# EAGLE board AALeC (EAGLE 8.4.1)
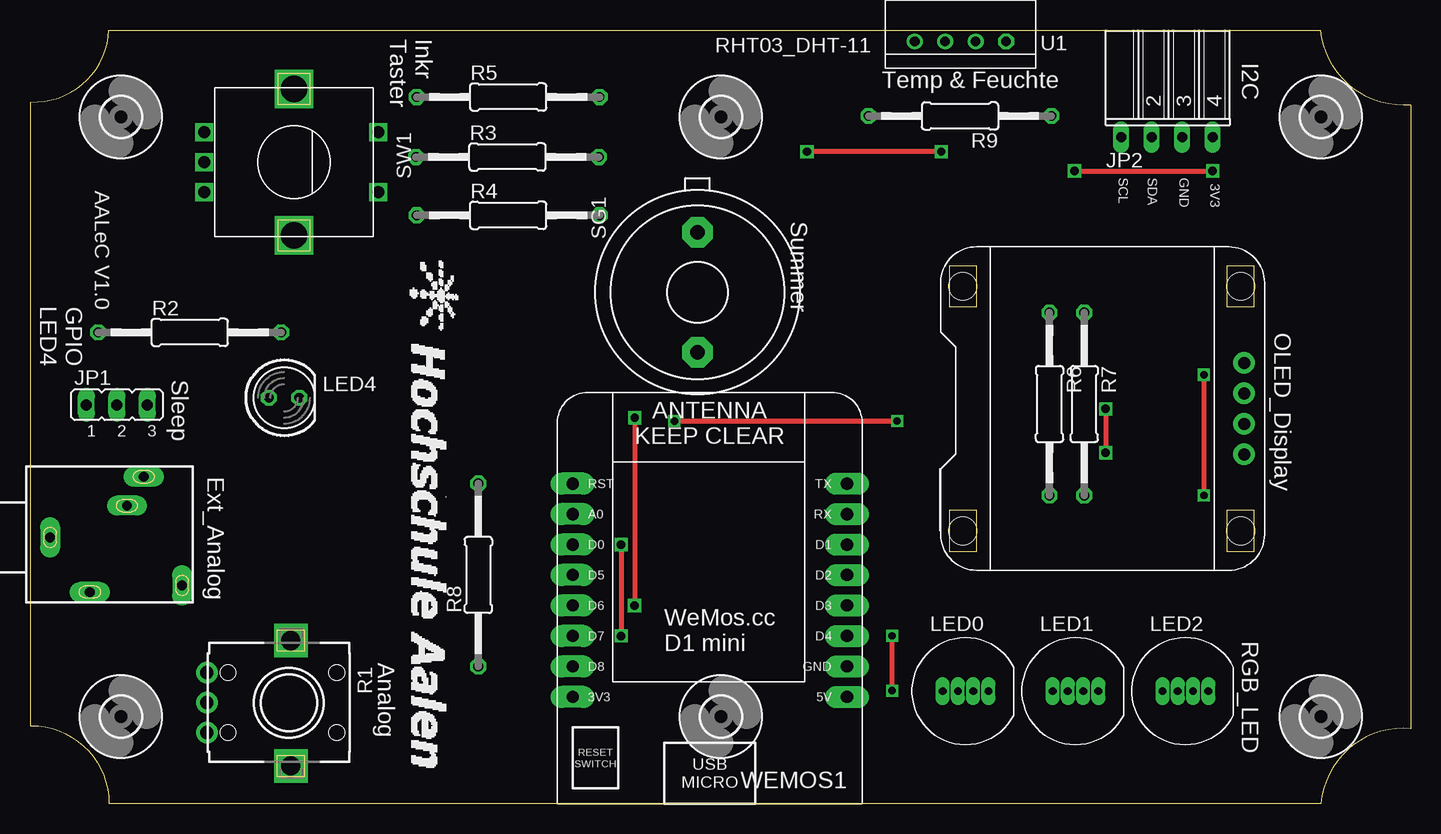
[diagram p0: board, top side]
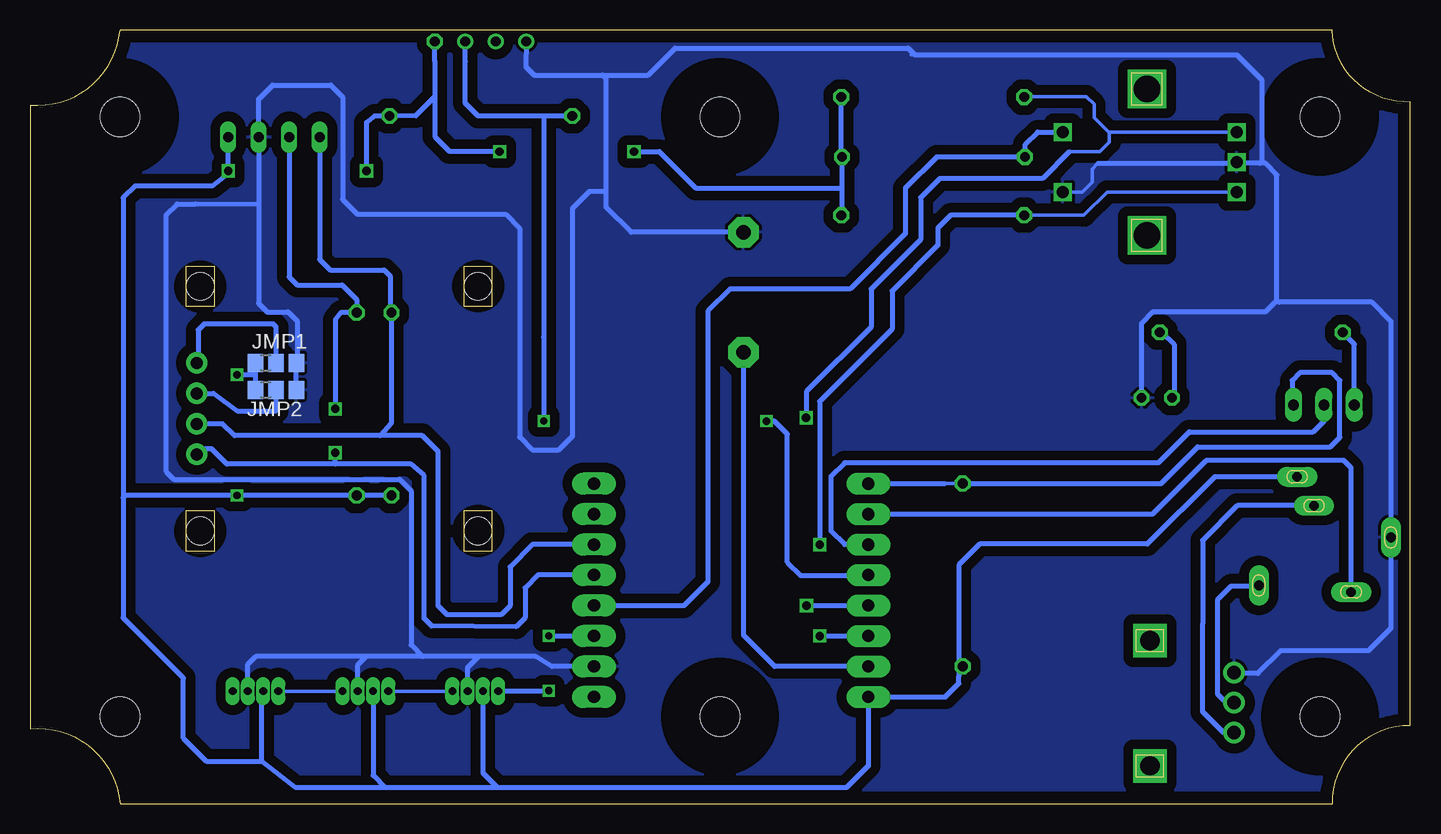
[diagram p1: board, bottom side, seen from below]

Size 115 x 64.5 mm. Coordinates in mm from the lower left corner, seen from the top.
Outline: 0,6.5 0,58.5 arc90 6.5,64.5 107.5,64.5 arc90 115,58.25 115,6.25 arc90 107.5,0 6.5,0 arc90 0,6.5
Copper layers (1*16): Top 0.035mm / dielectric 1.5mm / Bottom 0.035mm
Design rules "default *": minimum track width 10mil, minimum drill 19mil, track to track 8mil, track to pad 8mil, pad to pad 8mil, via to via 8mil, smd to smd 8mil, copper to edge 40mil, drill to drill 8mil, minimum pad ring 10mil, minimum via ring 8mil, stop-mask expansion 4mil, vias tented up to drill 0mil, thermal gap 10mil

## Footprints (pad centres in the part's own frame; a part is rotated, then mirrored left to right if it is on the bottom)
3,3 = hole 3.3: 0,0
A0R-JMP = smd 1.5 x 1.3: 1 0,1.7; 2 0,0; 3 0,-1.7
JP2 = drill 0.914 long: 1 -2.54,0; 2 0,0; 3 2.54,0
FE04W = drill 0.813 long: 1 -3.81,-6.35; 2 -1.27,-6.35; 3 1.27,-6.35; 4 3.81,-6.35
LED-PL9823-F8 = drill 0.65 long: 1 -1.905,0; 2 -0.635,0; 3 0.635,0; 4 1.905,0
LED5MM = drill 0.813 octagon: A -1.27,0; K 1.27,0
ALPS_1 = drill 1.1 pad 1.778: 1 -2.5,-7; 2 0,-7; 3 2.5,-7 | drill 1.6 pad 2.8 square: M1 5.27,0; M2 -5.17,0
0207/15 = drill 0.813 octagon: 1 -7.62,0; 2 7.62,0
F/EE17P = drill 1.194 pad 2.54 octagon: 1 -5.004,0; 2 5.004,0
ALPS_EC12E_SW = drill 1 square: A -2.5,-7.5; B 2.5,-7.5; C 0,-7.5; D -2.5,7; E 2.5,7 | drill 2.2 square: GND1 -6.1,0; GND2 6.1,0
DHT11 = drill 0.8: DATA -1.27,0; GND 3.81,0; NULL 1.27,0 | drill 0.8 octagon: VDD -3.81,0
OLED_0.96_I2C = drill 1 pad 1.778: GND -1.27,11.79; SCL 1.27,11.79; SDA 3.81,11.79; VCC -3.81,11.79 | hole 2.3: 10.19,-11.65; -10.19,11.5; 10.19,11.5; 10.19,-11.65; -10.2,-11.65
WEMOS-D1-MINI = drill 1.016 pad 1.829 long: 3V3 -10.16,-10.16; 5V 12.7,-10.16; A0 -10.16,5.08; D0 -10.16,2.54; D1 12.7,2.54; D2 12.7,0; D3 12.7,-2.54; D4 12.7,-5.08; D5 -10.16,0; D6 -10.16,-2.54; D7 -10.16,-5.08; D8 -10.16,-7.62; GND 12.7,-7.62; RESET -10.16,7.62; RX 12.7,5.08; TX 12.7,7.62
1503_09 = drill 0.8 pad 1.676 long: 1 0,-2.1; 2 -4.55,-5.4; 3 5.05,-9.9; 4 -4,-13.1; 5 2.65,-8.5

## Placement (x,y rotation side)
H1  MOUNT-HOLE3.3  [3,3]  57.5,7.25 0 top
H2  MOUNT-HOLE3.3  [3,3]  7.5,7.25 0 top
H3  MOUNT-HOLE3.3  [3,3]  7.5,57.25 0 top
H4  MOUNT-HOLE3.3  [3,3]  57.5,57.25 0 top
H5  MOUNT-HOLE3.3  [3,3]  107.5,7.25 0 top
H6  MOUNT-HOLE3.3  [3,3]  107.5,57.25 0 top
JMP1  0R-JUMPA  [A0R-JMP]  94.5,36.75 90 bottom
JMP2  0R-JUMPA  [A0R-JMP]  94.5,34.5 90 bottom
JP1  [JP2]  7.17,33.24 0 top
JP2  FE04-W  [FE04W]  94.67,61.91 0 top
LED0  LED-PL9823-F8  [LED-PL9823-F8]  77.89,9.37 0 top
LED1  LED-PL9823-F8  [LED-PL9823-F8]  87.05,9.37 0 top
LED2  LED-PL9823-F8  [LED-PL9823-F8]  96.21,9.37 0 top
LED4  grn  [LED5MM]  21.1,33.83 0 top
R1  ALPS_1  [ALPS_1]  21.66,8.41 270 top
R2  700R  [0207/15]  13.23,39.29 0 top
R3  10k  [0207/15]  39.71,53.91 0 top
R4  10k  [0207/15]  39.77,49.05 0 top
R5  10k  [0207/15]  39.77,58.91 0 top
R6  10k  [0207/15]  84.88,33.31 270 top
R7  10k  [0207/15]  87.78,33.31 270 top
R8  10k  [0207/15]  37.28,19.06 90 top
R9  4k7  [0207/15]  77.43,57.33 180 top
SG1  F/EE17P  [F/EE17P]  55.55,42.63 90 top
SW1  EC12E_SW  [ALPS_EC12E_SW]  21.93,53.48 270 top
U1  RHT03_DHT-11  [DHT11]  77.46,63.55 180 top
U$1  OLED_0.96_I2C  [OLED_0.96_I2C]  89.31,32.93 270 top
WEMOS1  Mini  [WEMOS-D1-MINI]  55.3,19.05 0 top
X1  1503_09  [1503_09]  -0.5,22.19 90 top

## Library data of the parts
H1-H6 = holes
JMP1 JMP2 = jump-0r-smd
JP1 = jumper
JP2 = con-lsta; OC_FARNELL: unknown; OC_NEWARK: unknown
LED0 LED1 LED2 = Ai_LED
LED4 = led
R1 = pot
R2-R9 = rcl
SG1 = buzzer; OC_FARNELL: unknown; OC_NEWARK: unknown
SW1 = switch-alps; MPN: EC12E2424407; OC_FARNELL: 1520813; OC_NEWARK: 74M1068
U1 = RHT03_DHT-22_AM2302
U$1 = tft_1.8_1.44_oled_0.96
WEMOS1 = esp8266modules
X1 = con-lumberg; OC_FARNELL: 1243244; OC_NEWARK: unknown

## Nets
+3V3: JMP1.1 JMP2.1 JP2.4 LED0.2 LED1.2 LED2.2 R3.2 R4.2 R5.2 R6.2 R7.2 R8.1 R9.1 U1.VDD WEMOS1.3V3 X1.3
+5V: WEMOS1.5V
ANALOG_INPUT: WEMOS1.A0 X1.2
ENERGIESPARPIN: JP1.2 WEMOS1.D0
GND: JMP1.3 JMP2.3 JP2.3 LED0.3 LED1.3 LED2.3 LED4.K R1.1 SG1.2 SW1.C SW1.E U1.GND WEMOS1.GND X1.1
LED_SERIELL: LED0.1 WEMOS1.D4
N$1: LED0.4 LED1.1
N$2: LED1.4 LED2.1
N$3: JP1.1 R2.1
N$4: LED4.A R2.2
N$5: JP1.3 R8.2 WEMOS1.RESET
N$6: R1.3 X1.5
N$7: R1.2 X1.4
N$8: JMP2.2 U$1.GND
N$9: JMP1.2 U$1.VCC
SCL: JP2.1 R6.1 U$1.SCL WEMOS1.D1
SDA: JP2.2 R7.1 U$1.SDA WEMOS1.D2
SPUR_A_DREHIMPULS: R5.1 SW1.A WEMOS1.D6
SPUR_B_DREHIMPULS: R4.1 SW1.B WEMOS1.D7
SUMMER: SG1.1 WEMOS1.D8
TASTER_DREHIMPULSGEBER: R3.1 SW1.D WEMOS1.D3
TEMP_FEUCHTE: R9.2 U1.DATA WEMOS1.D5

## Tracks (layer width: path | path; a pad name or v marks a point on that pad's centre or on a via)
+3V3  (via drill 0.6, 0.7)
  Top 0.406: v86.96,52.75 v98.48,52.75 | v75.86,54.36 v64.68,54.36 | v97.75,35.75 v97.75,25.69
  Bottom 0.305: R3.2 47.39,53.97 | 37.52,10.68 R8.1 | 37.6,10.62 R8.1 | 37.6,10.76 R8.1
  Bottom 0.406: R4.2 47.33,49.11 47.33,51.32 | 47.33,51.32 R3.2 | 47.39,53.97 R5.2 | X1.3 16.28,27.24 21.88,21.63 35.85,21.63 37.6,19.89 37.6,10.76 | 37.6,10.62 37.6,10 38.71,8.89 WEMOS1.3V3 45.14,3.14 46.97,1.31 76.02,1.31 | 76.02,1.31 85.38,1.31 | 85.38,1.31 92.84,1.31 95.7,3.54 | 95.7,3.54 95.7,9.24 LED2.2 | LED0.2 77.25,2.55 76.02,1.31 | LED1.2 86.42,2.35 85.38,1.31 | 95.7,3.54 100.31,3.54 102.21,5.44 102.21,10.46 107.25,15.5 107.25,25.5 | v86.96,52.75 86.96,56.78 86.29,57.33 R9.1 82.84,57.35 81.26,58.94 | JP2.4 v98.48,52.75 98.48,52.51 99.81,51.5 106.25,51.5 107.25,50.5 107.25,25.5 | 81.26,58.94 81.26,61.86 U1.VDD | 81.26,58.94 81.26,55.61 80.06,54.41 arc-90 80.01,54.36 v75.86,54.36 | v64.68,54.36 62.54,54.36 59.51,51.32 47.33,51.32 | JMP1.1 JMP2.1 96.2,35.75 v97.75,35.75 | R6.2 R7.2 v97.75,25.69 107.06,25.69 107.25,25.5
ANALOG_INPUT
  Bottom 0.305: 5.54,28.62 5.53,28.62
  Bottom 0.406: X1.2 4.9,27.98 5.54,28.62 | 5.53,28.62 16.96,28.62 21.45,24.13 WEMOS1.A0
ENERGIESPARPIN
  Bottom 0.305: 7.12,31.95 7.12,33.19 JP1.2
  Bottom 0.406: WEMOS1.D0 47.12,21.59 48.24,22.7 48.24,27.3 47.12,28.42 20.98,28.42 18.39,31 8.07,31 7.12,31.95
GND
  Bottom 0.305: SW1.E 27.3,50.98 26.49,51.8 26.49,52.91 26.01,53.38 | 10.93,41.8 11.09,41.95 | 41.57,62.43 41.25,62.43 | 12.36,53.54 12.52,53.38
  Bottom 0.406: 26.01,53.38 14.53,53.38 SW1.C 14.33,53.38 12.52,53.38 12.04,53.38 11.09,52.43 11.09,41.95 12.04,41 21.41,41 22.37,40.04 LED4.K | 10.93,41.8 3.15,41.8 1.56,40.21 1.56,22.27 X1.1 1.6,14.61 3.47,12.74 10.77,12.74 12.68,10.84 13.95,10.84 R1.1 | 12.36,53.54 12.36,60.37 14.42,62.43 41.25,62.43 41.82,63 61.25,63 63.5,60.75 67.28,60.75 | WEMOS1.GND 71.5,11.43 72.84,12.27 77.61,12.27 | 77.61,12.27 82.29,12.27 | 82.29,12.27 86.97,12.27 | 86.97,12.27 96.18,12.27 96.84,11.6 LED2.3 | LED0.3 78.53,11.35 77.61,12.27 | LED1.3 87.69,11.55 86.97,12.27 | 82.29,12.27 83.25,13.22 83.25,26.08 84.2,27.03 103,27.03 103.64,27.67 103.64,49.11 102.75,50 101.19,50 95.94,50.01 | JMP2.3 JMP1.3 92.75,36.8 92.75,40.25 93.5,41 95.25,41 95.94,41.69 95.94,50.01 | 95.94,50.01 JP2.3 95.94,58.75 94.79,59.9 89.93,59.9 88.94,58.91 88.94,50.36 87.71,49.13 75.37,49.13 74.19,47.95 74.19,30.55 73.13,29.49 70.94,29.49 69.79,30.64 69.79,49.64 68.37,51.06 67.01,51.06 66.98,51.03 | U1.GND 73.67,61.42 73,60.75 67.28,60.75 | 66.98,51.03 66.98,49.7 64.91,47.63 SG1.2 | 66.98,51.03 66.98,60.45 67.28,60.75
  pour Bottom (isolate 0.813): -2.49,67.22 -2.49,-2.75 117.5,-2.75 117.5,67.22
LED_SERIELL  (via drill 0.6)
  Top 0.406: v71.76,9.41 v71.76,13.98
  Bottom 0.406: LED0.1 75.86,9.41 v71.76,9.41 | v71.76,13.98 68,13.98 WEMOS1.D4
N$1
  Bottom 0.305: LED0.4 LED1.1
N$2
  Bottom 0.305: LED1.4 LED2.1
N$3
  Bottom 0.406: JP1.1 4.63,38.3 R2.1
N$4
  Bottom 0.305: 19.66,34 LED4.A
  Bottom 0.406: R2.2 20.65,39.29 19.66,38.3 19.66,34
N$5
  Bottom 0.305: 38.79,26.67 R8.2
  Bottom 0.406: WEMOS1.RESET 38.79,26.67 | R8.2 20.74,26.68 17.69,29.73 6.64,29.73 5.85,30.52 5.85,35.29 6.49,35.92 9.18,35.92 9.82,35.29 9.82,33.35 JP1.3
N$6
  Bottom 0.406: R1.3 15.53,5.91 17.28,7.66 17.28,13.06 17.28,14.97 17.28,21.95 14.39,24.84 X1.5
N$7
  Bottom 0.406: R1.2 15.33,8.41 16.01,9.09 16.01,17.03 14.9,18.14 12.65,18.14 X1.4
N$8
  Bottom 0.406: U$1.GND 99.69,34.19 97.75,32.75 94.5,32.75 JMP2.2
N$9
  Bottom 0.406: JMP1.2 94.5,39.75 94.75,40 100.5,40 101,39.5 101,37.15 U$1.VCC
SCL
  Bottom 0.406: WEMOS1.D1 73.16,21.59 75,19.75 75,16.5 75.75,15.75 80.25,15.75 81,16.5 81,29.37 82.32,30.68 85.83,30.68 | 85.83,30.68 97.97,30.68 98.96,31.66 100.42,31.66 U$1.SCL | 85.83,30.68 84.88,31.74 R6.1 85,41.05 85,44 85.5,44.5 90,44.5 90.86,45.36 JP2.1
SDA  (via drill 0.7)
  Top 0.406: v89.56,32.91 v89.56,29.25
  Bottom 0.305: 100.86,29.57 U$1.SDA 101.04,29.57
  Bottom 0.406: WEMOS1.D2 72.7,19.05 73.75,18 73.75,15.5 74.5,14.75 81.52,14.8 82.16,15.43 82.16,27.35 83.27,28.3 89.56,28.3 | 89.56,28.3 98.6,28.3 99.87,29.57 100.86,29.57 | v89.56,32.91 89.56,40.37 89.12,40.93 R7.1 87.78,42.03 89,43.25 92.75,43.25 93.4,43.9 JP2.2 | 89.56,28.3 v89.56,29.25
SPUR_A_DREHIMPULS  (via drill 0.7)
  Top 0.406: v50.32,32.17 v50.3,16.51
  Bottom 0.305: SW1.A 25.11,55.98 | 25.11,55.98 26.33,57.19 26.33,58.3 26.96,58.94 31.8,58.94 R5.1 | 25.11,55.98 arc90 25.06,55.92 25.06,55.13 25.85,54.34 28.39,54.34
  Bottom 0.406: 28.39,54.34 30.61,52.11 39.19,52.11 40.77,50.53 40.77,47.03 44.9,42.91 44.9,39.73 50.3,34.33 v50.32,32.17 | v50.3,16.51 WEMOS1.D6
SPUR_B_DREHIMPULS  (via drill 0.7)
  Top 0.406: v49.19,21.59 v49.19,13.97
  Bottom 0.305: SW1.B 25.24,50.98 27.17,49.05 R4.1
  Bottom 0.406: R4.1 38.28,49.05 39.35,47.99 39.35,46.56 43.16,42.75 43.16,39.57 49.19,33.54 v49.19,21.59 | v49.19,13.97 WEMOS1.D7
SUMMER
  Bottom 0.406: WEMOS1.D8 52.94,11.43 55.54,14.03 55.54,37.54 SG1.1
TASTER_DREHIMPULSGEBER
  Bottom 0.305: R3.1 32.04,53.96
  Bottom 0.406: 32.04,53.96 32.04,54.97 31.04,55.98 SW1.D | R3.1 39.45,53.91 42.05,51.32 42.05,47.51 46.65,42.91 56.65,42.91 58.51,41.05 58.51,18.5 60.51,16.5 WEMOS1.D3
TEMP_FEUCHTE  (via drill 0.6)
  Top 0.406: v53.63,31.88 v72.18,31.89
  Bottom 0.406: 72.18,57.33 77.65,57.33 78.72,58.39 78.72,61.86 U1.DATA | R9.2 72.18,57.33 | 72.18,57.33 72.19,38.87 v72.18,31.89 | v53.63,31.88 52.96,31.89 51.88,30.8 51.88,20.11 50.78,19.01 45.18,19.01 WEMOS1.D5

## Text on the board
tNames: Inkr / Taster | I2C | Temp & Feuchte | SCL | SDA | GND | AALeC V1.0 | 3V3 | Summer | OLED_Display | GPIO / LED4 | Sleep | Ext_Analog | RGB_LED | Analog